# Altium PCB PAPI_M1_Sensor.PcbDoc
Units mil, origin at the board's own origin, x right, y up, seen from the top; angles counter-clockwise.
Board outline 3937.01 x 2362.2 mil, 2 copper layers (Top Layer, Bottom Layer); 38 components, 31 nets, 268 pads, 13 vias.
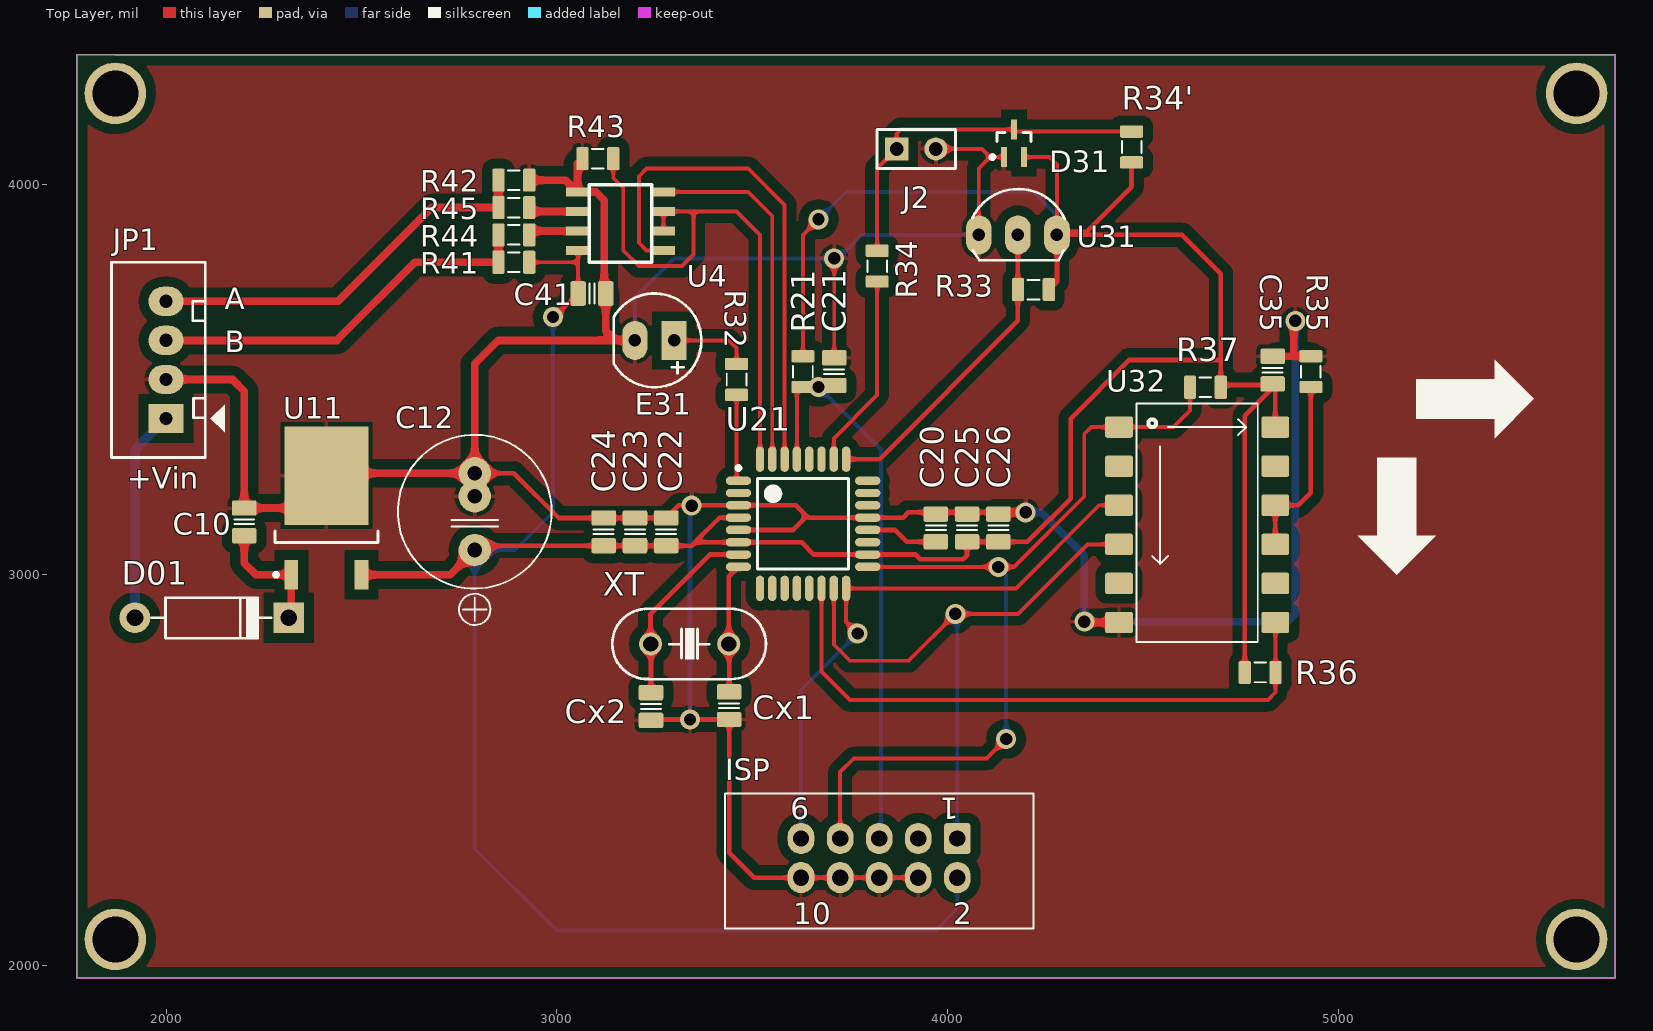
[diagram p0: Top Layer view]
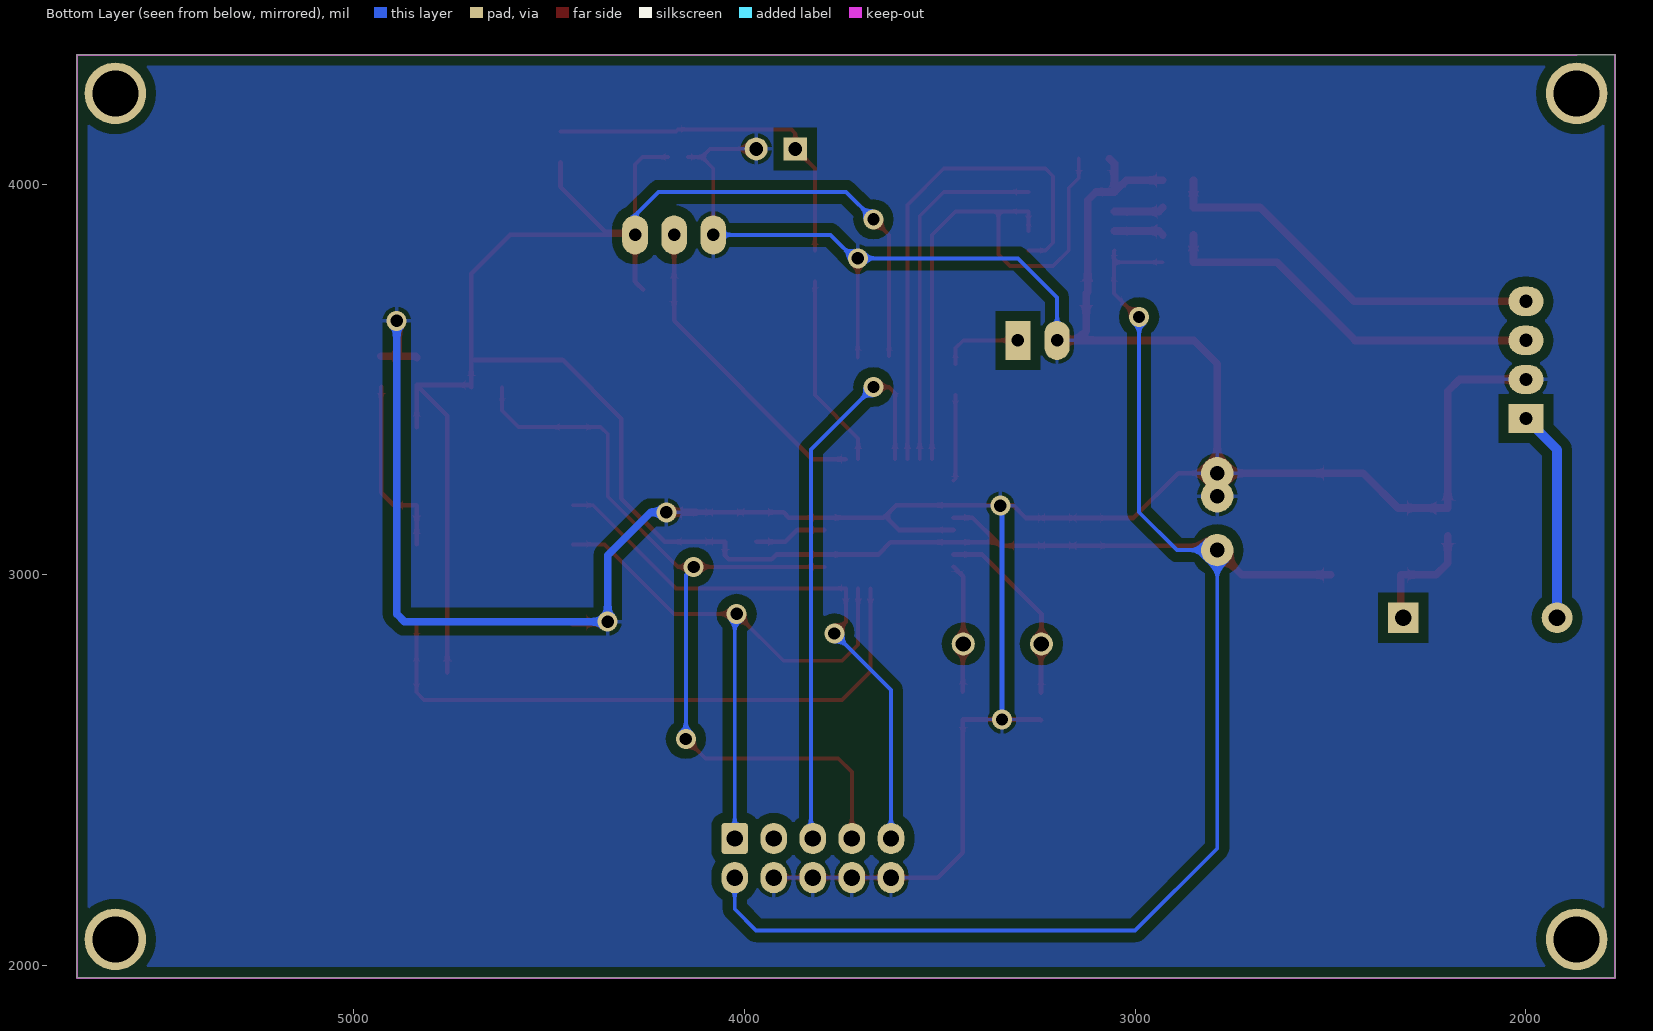
[diagram p1: Bottom Layer view, seen from below]
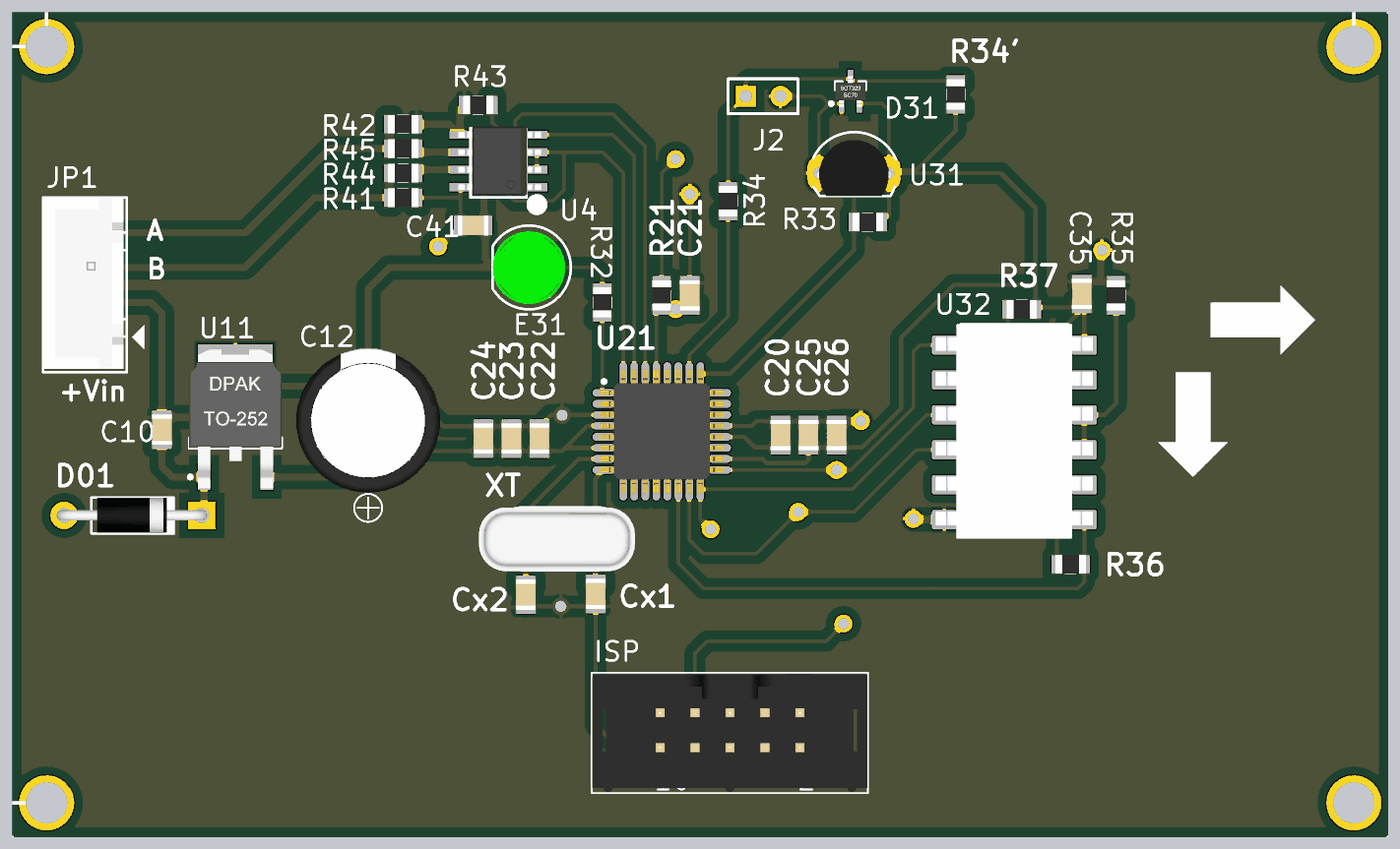
[diagram p2: 3D render of the assembled board from above, using the file's embedded part models]

## Layer stack, top to bottom
Top Solder: solder mask 0.4, Solder Resist, Dk 3.5
Top Layer: signal copper 1.4
Dielectric 1: dielectric 12.6, FR-4, Dk 4.8
Bottom Layer: signal copper 1.4
Bottom Solder: solder mask 0.4, Solder Resist, Dk 3.5

## Board outline
1771.65,1968.5 5708.66,1968.5 5708.66,4330.71 1771.65,4330.71

## Design rules (kind name [scope] priority, off if disabled: settings)
Clearance [All] p1: gap=8 ignorepadtopadclearanceinfootprint=FALSE except(0: Arc-Hole Track-Hole SMDPad-Hole THPad-Hole Via-Hole Fill-Hole Poly-Hole Region-Hole Text-Hole; 25: Arc-Poly Track-Poly SMDPad-Poly THPad-Poly Via-Poly Fill-Poly Poly-Poly)
PolygonConnect [All] p1: connectstyle=Relief reliefconductorwidth=10 reliefentries=4 polygonreliefangle="90 Angle" airgapwidth=10
RoutingVias [All] p1: holewidth=31.5 width=50 viastyle="Through Hole" minholewidth=27.56 minwidth=47.24 maxholewidth=118.11 maxwidth=196.85
SolderMaskExpansion [All] p1: expansion=4
Width [All] p1: maxlimit=100 minlimit=10 preferedwidth=10
30 further rules are at their usual default settings.

## Components (designator, comment, footprint, x,y, rotation, side; value= is the part's Value field where it differs from the comment)
C10 "Tụ điện dán 0805104" CAPC2012N_F 2200.01,3135.43 r270 top value=104
C12 "Cap" CAPE3.5-5.0MM_Rad_10x14mm 2790,3161.57 r90 top value=35V/220uF
C20 "Tụ điện dán 0603104" CAPC2012N_F 3970,3120 r270 top value=104
C21 "Tụ điện dán 0603104" CAPC2012N_F 3710,3520 r270 top value=104
C22 "Tụ điện dán 0805104" CAPC2012N_F 3280,3110 r270 top value=104
C23 "Tụ điện dán 0805104" CAPC2012N_F 3200,3110 r270 top value=104
C24 "Tụ điện dán 0805105" CAPC2012N_F 3120,3110 r270 top value=105
C25 "Tụ điện dán 0805103" CAPC2012N_F 4050,3120 r270 top value=103
C26 "Tụ điện dán 0805103" CAPC2012N_F 4130,3120 r270 top value=103
C35 "Tụ điện dán 0805104" CAPC2012N_F 4832,3524 r90 top value=104
C41 "Tụ điện dán 0805104" CAPC2012N_F 3090,3720 r0 top value=104
Cx1 "Tụ điện dán 060322" CAPC2012N_F 3441,2665 r270 top value=22
Cx2 "Tụ điện dán 060322" CAPC2012N_F 3241,2663 r270 top value=22
D01 "Đi ốt cắm1N4007" DO-41 2314,2890 r180 top
D31 "BAV99" SOT323 4115,4034.57 r0 top
E31 "Led" "LED 5mm Green" 3250,3600 r180 top
ISP "Giắc đôi 5x2 chân 2.54mm" 10P_PCB_HEADER_BRD_MNT 3825,2275 r270 top value="Double-row, 10 positions"
J2 "Light sensor" HDR1X2 3870,4090 r0 top
JP1 "JP4" CON4 2000,3400 r90 top value="Connector 4"
R21 "Điện trở dán 060310k" RESC2012N_F 3630,3520 r90 top value=10k
R32 "Điện trở dán 0603330R" RESC2012N_F 3460,3500 r90 top value=330R
R33 "Res_10k_0603" RESC2012N_F 4220,3730 r0 top value=10k
R34 "Res_10k_0603" RESC2012N_F 3820,3790 r90 top value=10k
R34' "Res_10k_0603" RESC2012N_F 4471,4095 r270 top value=10k
R35 "Điện trở dán 060310k" RESC2012N_F 4930,3520 r270 top value=10k
R36 "Điện trở dán 060310k" RESC2012N_F 4800,2750 r0 top value=10k
R37 "Điện trở dán 060310k" RESC2012N_F 4660,3480 r180 top value=10k
R41 "Res_1k_0603" RESC2012N_F 2890,3800 r0 top value=1k
R42 "Res_1k_0603" RESC2012N_F 2890,4010 r180 top value=1k
R43 "Res_10k_0603" RESC2012N_F 3105,4065 r0 top value=10k
R44 "Res_10R_0805" RESC2012N_F 2890,3870 r180 top value=10R
R45 "Res_10R_0805" RESC2012N_F 2890,3940 r180 top value=10R
U4 "MAX485" "SOIC 8" 3273,3780 r180 top
U11 "78M05" "TO252 D-PAK" 2410.24,3171.26 r90 top
U21 "ATmega328PA" TQFP32 3630.25,3130.65 r0 top
U31 "DS18B20+" QTO-92 4180,3870 r0 top
U32 "SCA100T" SCA100T 4414,2828 r0 top
XT "16MHz" XT2 3340,2823 r0 top

## Footprints (in the part's own frame and the unit in brackets; to place one, negate y for a bottom-side part, rotate by r counter-clockwise, add the part's x,y. Pads: shape width x height; smd on the part's side, far side on the other; paste and mask are expansions set on the pad)
10P_PCB_HEADER_BRD_MNT [mil] "HEADER BRD MNT 10POS 2.54MM"
  round 40 on Mech14: 0(0,0)
  rrect25% 80x68 hole 42: 1(-50,200)
  oval 80x68 hole 42: 2(50,200) 3(-50,100) 4(50,100) 5(-50,0) 6(50,0) 7(-50,-100) 8(50,-100) 9(-50,-200) 10(50,-200)
  silkscreen extent -165,-395 180,395, body extent -162,-394 178,394, height 390
CAPC2012N_F [mm] "Chip Capacitor, Body 2.0x1.2mm, 0805, IPC Medium Density, for Flex circuits"
  round 0.254 on Mech14: 0(0,0)
  rrect25% 1.2x1.4 on Top Solder: 1(-0.9,0) 1(0.9,0)
  rrect25% 1x1.6 smd paste-1: 1(-0.9,0) 2(0.9,0)
  rrect25% 1x1.4 on Top Paste: 1(-0.9,0) 1(0.9,0)
  Top Layer pour cut-out: -0.4,0.8 0.4,0.8 0.4,-0.8 -0.4,-0.8
  silkscreen extent -0.15,-0.65 0.15,0.65, body extent -1.1,-0.72 1.1,0.73, height 1.34
CAPE3.5-5.0MM_Rad_10x14mm [mm] "3.5 & 5.0mm Pitch Radial Capacitor 10x14mm DxH"
  round 0.5 on Mech14: 0(0,0)
  round 2.1 hole 0.965: 1(-2.5,0) 2(1,0) 2(2.5,0)
  silkscreen extent -7.37,-5 5,5, body extent -5.25,-5.24 5.21,5.24, height 13.99
CON4 [mil] "CON4"
  rect 75x90 hole 34: 1(0,0)
  oval 75x90 hole 34: 2(100,0) 3(200,0) 4(300,0)
  silkscreen extent -100,-150 400,140, body extent -90,-90 398,136, height 276
DO-41 [mm] "1N4007"
  round 2 hole 1.1: A(10,0)
  rect 2x2 hole 1.1: K(0,0)
  silkscreen extent 1.15,-1.3 8.93,1.33, body extent -0.4,-1.28 10.52,1.28, height 2.55
HDR1X2 [mm] "Connector; Header; 2 Position"
  rect 1.5x1.5 hole 0.9: 1(0,0)
  round 1.5 hole 0.9: 2(2.54,0)
  silkscreen extent -1.27,-1.27 3.81,1.27, body extent -1.27,-1.27 3.81,1.27, height 7
"LED 5mm Green" [mil]
  rect 65x100 hole 32: 1(-50,0)
  oval 65x100 hole 32: 2(50,0)
  silkscreen extent -120,-120 104,120, body extent -104,-104 104,105, height 387
QTO-92 [mil] "TO-92"
  oval 66x100 hole 32: 1(-100,0) 2(0,0) 3(100,0)
  silkscreen extent -117,-65 120,118, body extent -109,-66 109,95, height 385
RESC2012N_F [mm] "Chip Resistor, Body 2.0x1.2mm, 0805, IPC Medium Density"
  round 0.254 on Mech14: 0(0,0)
  rrect25% 1x1.3 on Top Solder: 1(-1,0) 1(1,0)
  rrect25% 0.8x1.5 smd paste-1: 1(-1,0) 2(1,0)
  rrect25% 0.8x1.3 on Top Paste: 1(-1,0) 1(1,0)
  Top Layer pour cut-out: -0.6,0.75 0.6,0.75 0.6,-0.75 -0.6,-0.75
  silkscreen extent -0.38,-0.64 0.38,0.64, body extent -1.1,-0.67 1.1,0.68, height 0.69
SCA100T [mm]
  rrect20% 1.81x1.39 smd: 1(0.635,13.97) 2(0.635,11.43) 3(0.635,8.89) 4(0.635,6.35) 5(0.635,3.81) 6(0.635,1.27) 7(10.795,1.27) 8(10.795,3.81) 9(10.795,6.35) 10(10.795,8.89) 11(10.795,11.43) 12(10.795,13.97)
  silkscreen extent 1.78,0 9.65,15.49, body extent 0,-0.11 11.4,15.49, height 5.34
"SOIC 8" [mm]
  round 1.524 on Top Overlay: 1(0,0)
  rect 1.52x0.6 smd: 1(0,-1.27) 2(0,-2.54) 3(0,-3.81) 4(0,-5.08) 5(5.588,-5.08) 6(5.588,-3.81) 7(5.588,-2.54) 8(5.588,-1.27)
  silkscreen extent 0.76,-5.55 4.83,-0.51, body extent -0.31,-5.67 5.71,-0.67, height 1.75
SOT323 [mm] "SOT323 (SC70)"
  rect 0.4x1.3 smd: 1(0.747,0.878) 2(2.047,0.878) 3(1.397,2.678)
  silkscreen extent -0.13,0.75 2.5,2.48, body extent 0.3,0.63 2.5,2.88, height 1.11
"TO252 D-PAK" [mm]
  rect 1.9x0.9 smd: 1(-4.35,2.28) 3(-4.35,-2.28)
  rect 6.4x5.45 smd: 2(2.1,0)
  silkscreen extent -4.47,-3.35 -1.5,3.4, body extent -5.18,-3.37 4.92,3.37, height 2.38
TQFP32 [mm] "32-TQFP (7x7)"
  oval 1.65x0.55 smd: 1(-4.2,2.8) 2(-4.2,2) 3(-4.2,1.2) 4(-4.2,0.4) 5(-4.2,-0.4) 6(-4.2,-1.2) 7(-4.2,-2) 8(-4.2,-2.8) 17(4.2,-2.8) 18(4.2,-2) 19(4.2,-1.2) 20(4.2,-0.4) 21(4.2,0.4) 22(4.2,1.2) 23(4.2,2) 24(4.2,2.8)
  oval 0.55x1.65 smd: 9(-2.8,-4.2) 10(-2,-4.2) 11(-1.2,-4.2) 12(-0.4,-4.2) 13(0.4,-4.2) 14(1.2,-4.2) 15(2,-4.2) 16(2.8,-4.2) 25(2.8,4.2) 26(2,4.2) 27(1.2,4.2) 28(0.4,4.2) 29(-0.4,4.2) 30(-1.2,4.2) 31(-2,4.2) 32(-2.8,4.2)
  silkscreen extent -4.32,-2.95 2.95,3.75, body extent -4.5,-4.5 4.5,4.5, height 1.6
XT2 [mm]
  round 1.5 hole 1: 1(-2.54,0) 2(2.54,0)
  silkscreen extent -5.03,-2.29 4.96,2.29, body extent -5.93,-2.36 5.42,2.29, height 3.5

## Part data
C10 C20 C21 C22 C23 C24 C25 C26 C35 C41 Cx1 Cx2: library part "CAP NP", "Capacitor non polarized", cm1="T? di?n dán 0603", cm2="T? di?n dán 0805", cm3="T? di?n dán 1206"
D01: library part Diode, cm1="Ði ?t c?m", cm2="Ði ?t dán", vl1=1N4007, vl3="TVS 1.5KE300A 19A 300V", vl4="HER508 5A 1000V"
D31: library part BAV99W, "Diode Array 1 Pair Series Connection Standard 70V 215mA (DC) Surface Mount SC-70, SOT-323"
ISP: library part CONN_HEADER_2x5P_0.100in_Male, "Header THD 10 POS Double-row 2.54mm pitch", Manufacturer 1=3M, Manufacturer Part Number 1=D2510-6002-AR, Package / Case="Connector header; 2.54mm pitch", Supplier Part Number 1=MHC10E-ND, ComponentLink1Description=http://multimedia.3m.com/mws/mediawebserver?66666UuZjcFSLXTtm8T_oxMcEVuQEcuZgVs6EVs6E666666--, ComponentLink1URL=http://multimedia.3m.com/mws/mediawebserver?66666UuZjcFSLXTtm8T_oxMcEVuQEcuZgVs6EVs6E666666--, Connector Type="Header, Shrouded", Contact Mating Length="0.243\" (6.17mm)", Contact Type="Male Pin", Number of Positions=10, Number of Rows=2, Pitch="0.100\" (2.54mm)", QtyOverride=1, Row Spacing="0.100\" (2.54mm)", Supplier 1=Digi-Key
J2: library part "Header 2", "Header, 2-Pin", LatestRevisionDate=17-Jul-2002, LatestRevisionNote="Re-released for DXP Platform.", Publisher="Altium Limited"
JP1: library part Con4, "Connector 4"
R21 R32 R35 R36 R37: library part Res, "Resistor", cm1="Ði?n tr? dán 0603", cm2="Ði?n tr? c?m 1/4W", cm3="Ði?n tr? dán 0805", cm4="Ði?n tr? dán 1206"
R33 R34 R34' R41 R42 R43 R44 R45: library part Res
U4: "RS232 - RS485 (Same sn75176)"
U11: library part LM78xx, "Linear Voltage Regulators 5V 500mA Positive"
U21: library part ATmega48/168/328, "ATmega48/168/328"
U31: library part DS18B20, "SENSOR TEMPERATURE 1-WIRE TO92-3", Digi-Key Part Number=DS18B20+-ND
U32: "Accelerometer X, Y Axis ±12g 400Hz 12-SMD"
XT: library part Crystal

## Free pads (board coordinates)
  round 157.48 hole 118.11: A(1870.08,2066.93) A(1870.08,4232.28) A(5610.24,2066.93) A(5610.24,4232.28)

## Via types
v1: diameter 51.18, hole 31.5, Top Layer to Bottom Layer, 11 vias
v2: diameter 51.18, hole 31.5, Top Layer to Bottom Layer, tented both sides, 2 vias

## Nets (pads, with @x,y where several pads share a name; then routed paths per layer and width w, separated by ;. In a path a pad name is that pad's centre, name@x,y a point inside that pad or via, vN(x,y) a via of type N, cw(c..) or ccw(c..) an arc to the next point about the centre after c; other vN are vias at no path point)
+5V: C12.1 C22.2 C23.2 C24.2 C25.2 C26.2 C35.1@4832,3488.57 C41.1@3054.57,3720 D31.2 ISP.2 R21.2 R33.2 R34'.2 R36.1@4760.63,2750 R37.1@4699.37,3480 R41.2 U4.8 U11.3 U21.4 U21.6 U21.18 U31.3 U32.12 | length 9566.2
  Top Layer w10: R41.2 3054.57,3800 ; v1(2990,3660) 2994.57,3660 3054.57,3720 3054.57,3800 ; U4.8 3054.57,3828.43 3054.57,3800 ; R21.2 3630,3870 v1(3670,3910) ; D31.2 4260.87,4069.13 4280,4050 U31.3@4280,3878
  Top Layer w12: C12.1 2801.42,3074.57 C24.2 C23.2 C22.2 3344.57,3074.57 3353.4,3083.4 ; U21.4 3416.39,3146.39 3353.4,3083.4 ; R33.2 4280,3750.63 U31.3 ; R34'.2 4471,3993 4356,3878 4280,3878 U31.3 ; R36.1@4760.63,2750 4760.63,3407.2 C35.1@4839,3485.57 ; U32.12 C35.1@4839,3485.57 ; 3353.4,3083.4 U21.6 3626.6,3083.4 3658.09,3051.91 U21.18 3918.09,3051.91 3930,3040 4040,3040 4050,3050 C25.2 C26.2 4204.57,3084.57 4315,3195 4315,3400 4465,3550 4699.37,3550 ; U31.3 4600,3870 4699.37,3770.63 4699.37,3550 ; 4699.37,3550 4699.37,3480 4704.94,3485.57 C35.1@4839,3485.57
  Top Layer w20: U11.3 2726.85,3000 C12.1
  Bottom Layer w10: v1(2990,3660) 2990,3160 2893.15,3063.15 C12.1 2790,2300 3000,2090 3970,2090 4025,2145 ISP.2 ; v1(3670,3910) 3740,3980 4220,3980 4280,3920 U31.3
+24V: D01.A JP1.1 | length 543
  Bottom Layer w25: D01.A 1920.3,3320.3 JP1.1
AREF: C20.2 U21.20 | length 187
  Top Layer w12: U21.20 3865.1,3114.9 3895.43,3084.57 C20.2
CSB: R36.2 U21.14 U32.7 | length 1591.5
  Top Layer w10: U21.14 3677.5,2752.5 3750,2680 4820,2680 4839.37,2699.37 R36.2 4839.37,2877.63 U32.7
GND: C10.1@2200.01,3170.86 C12.2 C20.1@3970,3155.43 C21.1@3710,3555.43 C22.1@3280,3145.43 C23.1@3200,3145.43 C24.1@3120,3145.43 C25.1@4050,3155.43 C26.1@4130,3155.43 C35.2 C41.2 Cx1.2 Cx2.2 D31.1 E31.2 ISP.4 ISP.6 ISP.8 ISP.10 J2.2 JP1.2 R35.1@4930,3559.37 R42.1@2929.37,4010 R43.1@3065.63,4065 U4.5 U11.2 U21.3 U21.5 U21.21 U31.1 U32.6 | length 9471.4
  Top Layer w10: C21.1@3710,3555.43 v1(3710,3810) ; J2.2 4088.27,4090 4109.13,4069.13 ; U31.1 4080,4040 4109.13,4069.13 ; D31.1 4109.13,4069.13
  Top Layer w12: C12.2@2790,3260 2890,3260 3004.57,3145.43 3120,3145.43 3200,3145.43 3280,3145.43 3312.46,3177.89 U21.3 3612.11,3177.89 3640,3150 ; Cx2.2 3243,2629.57 v2(3341,2629.57) Cx1.2 3441,2289 3505,2225 ISP.10 ISP.8 ISP.6 ISP.4 ; U21.5 3604.9,3114.9 3640,3150 ; C26.1@4130,3155.43 4125.43,3160 3900,3160 3886.39,3146.39 U21.21 3643.61,3146.39 3640,3150
  Top Layer w20: JP1.2 2170,3500 2200.01,3469.99 2200.01,3170.86 2327.16,3170.86 U11.2 2416.3,3260 2790,3260 2790,3540 2850,3600 3150,3600 ; R42.1@2929.37,4010 3023,4010 U4.5 ; R43.1@3065.63,4065 3053,4052.37 U4.5 ; E31.2 3150,3600 ; C26.1@4125.43,3160 v1(4200,3160) ; v1(4350,2880) 4352,2878 U32.6 ; C35.2@4839,3556.43 4841.94,3559.37 4885.97,3559.37 ; v1(4890,3650) 4885.97,3645.97 4885.97,3559.37 ; R35.1@4930,3559.37 4885.97,3559.37 ; U4.5 3100,3980 3121.37,3958.63 3121.37,3724.06 C41.2 3125.43,3624.57 3150,3600
  Bottom Layer w10: E31.2 3200,3710 3300,3810 v1(3710,3810) 3710,3800 3780,3870 U31.1
  Bottom Layer w12: v2(3341,2629.57) 3341,3173 v2(3345,3177)
  Bottom Layer w20: v1(4200,3160) 4240,3160 4350,3050 v1(4350,2880) 4870,2880 4890,2900 v1(4890,3650)
I2C_CLK: U21.28
I2C_DATA: U21.27
LED: R32.1@3460,3460.63 U21.1 | length 221.8
  Top Layer w10: R32.1@3460,3460.63 3460,3245.78 U21.1
LIGHT: R34.1@3820,3750.63 U21.26 | length 500.6
  Top Layer w10: U21.26 3708.99,3348.99 3820,3460 R34.1@3820,3750.63
MCU_RX: U4.1@3273,3830 U21.30 | length 1312.1
  Top Layer w10: U4.1@3273,3830 3230,3830 3210,3850 3210,4020 3230,4040 3490,4040 3583.01,3946.99 U21.30
MCU_TX: U4.4 U21.31 | length 926.5
  Top Layer w10: U4.4 3490,3980 3551.51,3918.49 U21.31
MISO: ISP.9 U21.16 U32.3 | length 1499.2
  Top Layer w10: v1(3770,2850) 3740.49,2879.51 U21.16 4175.29,2965.29 4388,3178 U32.3
  Bottom Layer w10: ISP.9 3625,2705 v1(3770,2850)
MOSI: ISP.1 U21.15 U32.4 | length 1591.8
  Top Layer w10: U21.15 3708.99,2821.01 3750,2780 3900,2780 v1(4020,2900) 4180,2900 4358,3078 U32.4
  Bottom Layer w10: v1(4020,2900) 4025,2895 ISP.1
NetC10_2: C10.2 D01.K U11.1 | length 315.6
  Top Layer w20: C10.2 2200.01,3029.99 2230,3000 U11.1 2320.47,2896.47 D01.K
NetD31_3: D31.3 J2.1 R34'.1@4471,4134.37 R34.2 | length 928.8
  Top Layer w10: R34.2 3820,4040 J2.1 3870,4130 3880,4140 D31.3 4175.63,4134.37 R34'.1@4471,4134.37
NetE31_1: E31.1 R32.2 | length 208.9
  Top Layer w10: E31.1 3440,3600 3460,3580 R32.2
NetR35_2: R35.2 U32.9 U32.10 | length 474.9
  Top Layer w12: U32.9 U32.10 4898,3178 4930,3210 R35.2
NetR44_1: R44.1@2929.37,3870 U4.7 | length 127.8
  Top Layer w20: R44.1@2929.37,3870 2939.37,3880 U4.7
NetR45_1: R45.1@2929.37,3940 U4.6 | length 127.8
  Top Layer w20: R45.1@2929.37,3940 2939.37,3930 U4.6
PD4: U21.2
PD5: U21.9
PD6: U21.10
PD7: U21.11
RD485: R43.2 U4.2 U4.3 U21.32 | length 1460.5
  Top Layer w10: R43.2 3144.37,4015.63 3170,3990 3170,3830 3210,3790 3320,3790 3350,3820 3350,3930 ; U4.2 U4.3 3350,3930 ; U21.32 3520.02,3869.98 3460,3930 3350,3930
RS485A: JP1.4 R42.2 R45.2 | length 1020
  Top Layer w20: JP1.4 2440,3700 2680,3940 R45.2 R42.2
RS485B: JP1.3 R41.1@2850.63,3800 R44.2 | length 1003.5
  Top Layer w20: JP1.3 2437,3600 2637,3800 2850.63,3800 R44.2
RST: C21.2 ISP.5 R21.1@3630,3480.63 U21.29 | length 1455
  Top Layer w10: U21.29 3614.5,3465.13 3630,3480.63 v1(3670,3480.63)
  Bottom Layer w10: v1(3670,3480.63) 3830,3320.63 3830,2330 ISP.5
SCK: ISP.7 R37.2 U21.17 U32.1 | length 2222.7
  Top Layer w10: ISP.7 3725,2495 3760,2530 4100,2530 v1(4150,2580) ; U21.17 4129.59,3020.41 v1(4130,3020) 4170,3020 4350,3200 4350,3360 4368,3378 U32.1 4578,3378 4620.63,3420.63 R37.2
  Bottom Layer w10: v1(4130,3020) 4150,3000 v1(4150,2580)
TEMP: R33.1@4180.63,3730 U21.25 U31.2 | length 806.1
  Top Layer w12: U21.25 3826,3296 4180,3650 U31.2
XTAL1: Cx2.1@3241,2698.43 U21.7 XT.1 | length 489.8
  Top Layer w12: Cx2.1@3241,2698.43 3241,2822 XT.1 3240,2900 3391.91,3051.91 U21.7
XTAL2: Cx1.1@3441,2700.43 U21.8 XT.2 | length 330.7
  Top Layer w12: Cx1.1@3441,2700.43 3441,2822 XT.2 3440,2995.51 U21.8
pads on no net: C10.0 C10.1@2200,3100 C10.1@2200,3170.87 C10.1@2200.01,3100 C10.1@2200.01,3170.86 C12.0 C20.0 C20.1@3969.99,3084.57 C20.1@3969.99,3155.44 C20.1@3970,3084.57 C20.1@3970,3155.43 C21.0 C21.1@3709.99,3484.57 C21.1@3709.99,3555.44 C21.1@3710,3484.57 C21.1@3710,3555.43 C22.0 C22.1@3279.99,3074.57 C22.1@3279.99,3145.44 C22.1@3280,3074.57 C22.1@3280,3145.43 C23.0 C23.1@3199.99,3074.57 C23.1@3199.99,3145.44 C23.1@3200,3074.57 C23.1@3200,3145.43 C24.0 C24.1@3119.99,3074.57 C24.1@3119.99,3145.44 C24.1@3120,3074.57 C24.1@3120,3145.43 C25.0 C25.1@4049.99,3084.57 C25.1@4049.99,3155.44 C25.1@4050,3084.57 C25.1@4050,3155.43 C26.0 C26.1@4129.99,3084.57 C26.1@4129.99,3155.44 C26.1@4130,3084.57 C26.1@4130,3155.43 C35.0 C35.1@4832,3488.57 C35.1@4832,3559.43 C35.1@4832.01,3488.56 C35.1@4832.01,3559.43 C41.0 C41.1@3054.56,3719.99 C41.1@3054.57,3720 C41.1@3125.43,3719.99 C41.1@3125.43,3720 Cx1.0 Cx1.1@3440.99,2629.57 Cx1.1@3440.99,2700.44 Cx1.1@3441,2629.57 Cx1.1@3441,2700.43 Cx2.0 Cx2.1@3240.99,2627.57 Cx2.1@3240.99,2698.44 Cx2.1@3241,2627.57 Cx2.1@3241,2698.43 ISP.0 ISP.3 R21.0 R21.1@3630,3480.63 R21.1@3630,3559.37 R21.1@3630.01,3480.63 R21.1@3630.01,3559.37 R32.0 R32.1@3460,3460.63 R32.1@3460,3539.37 R32.1@3460.01,3460.63 R32.1@3460.01,3539.37 R33.0 R33.1@4180.63,3729.99 R33.1@4180.63,3730 R33.1@4259.37,3729.99 R33.1@4259.37,3730 R34'.0 R34'.1@4470.99,4055.63 R34'.1@4470.99,4134.37 R34'.1@4471,4055.63 R34'.1@4471,4134.37 R34.0 R34.1@3820,3750.63 R34.1@3820,3829.37 R34.1@3820.01,3750.63 R34.1@3820.01,3829.37 R35.0 R35.1@4929.99,3480.63 R35.1@4929.99,3559.37 R35.1@4930,3480.63 R35.1@4930,3559.37 R36.0 R36.1@4760.63,2749.99 R36.1@4760.63,2750 R36.1@4839.37,2749.99 R36.1@4839.37,2750 R37.0 R37.1@4620.63,3480 R37.1@4620.63,3480.01 R37.1@4699.37,3480 R37.1@4699.37,3480.01 R41.0 R41.1@2850.63,3799.99 R41.1@2850.63,3800 R41.1@2929.37,3799.99 R41.1@2929.37,3800 R42.0 R42.1@2850.63,4010 R42.1@2850.63,4010.01 R42.1@2929.37,4010 R42.1@2929.37,4010.01 R43.0 R43.1@3065.63,4064.99 R43.1@3065.63,4065 R43.1@3144.37,4064.99 R43.1@3144.37,4065 R44.0 R44.1@2850.63,3870 R44.1@2850.63,3870.01 R44.1@2929.37,3870 R44.1@2929.37,3870.01 R45.0 R45.1@2850.63,3940 R45.1@2850.63,3940.01 R45.1@2929.37,3940 R45.1@2929.37,3940.01 U4.1@3273,3780 U21.12 U21.13 U21.19 U21.22 U21.23 U21.24 U32.2 U32.5 U32.8 U32.11

## Polygon pours and split planes (outlines as drawn)
GND on Top Layer "GND_L01_P004" (solid, remove dead copper, pour order 4): 1771.65,1968.5 5708.66,1968.5 5708.66,4330.71 1771.65,4330.71
GND on Bottom Layer "GND_L02_P006" (solid, remove dead copper, pour order 6): 5708.66,1968.5 5708.66,4330.71 1771.65,4330.71 1771.65,1968.5

## Keep-outs
Keep-Out Layer:
  lines w5: 1771.65,4330.71 1771.65,1968.5 5708.66,1968.5 5708.66,4330.71 1870.08,4330.71

## Silkscreen, mask and mechanical layers (free items; w line width, h text height)
Top Overlay:
  region: 5200,3400 5400,3400 5400,3350 5500,3450 5400,3550 5400,3500 5200,3500
  region: 5100,3300 5100,3100 5050,3100 5150,3000 5250,3100 5200,3100 5200,3300
  text "A" at 2150,3680 h55.12
  text "B" at 2150,3570 h55.12
  text "+Vin" at 1900,3220 h55.12
Drill Drawing:
  the board outline again, w10

## Dimensions
1870.08,4232.28 to 1870.08,2066.93 on Top Overlay
5708.66,4330.71 to 5708.66,1968.5 on Top Overlay
1771.65,1968.5 to 5708.66,1968.5 on Top Overlay
1870.08,4232.28 to 5610.24,4232.28 on Top Overlay

## Text inside footprints (layer, text, board x,y; h text height)
ISP: Top Overlay "2" at 4015,2105 h55.12; Top Overlay "1" at 4028.57,2430 h55.12 r180; Top Overlay "10" at 3604.72,2105 h55.12; Top Overlay "9" at 3646,2430 h55.12 r180